# Altium PCB Trottinette_Connexion_PCB ASCII REV 1.00.PcbDoc
Units mil, origin at the board's own origin, x right, y up, seen from the top; angles counter-clockwise.
Board outline 2559.06 x 4133.86 mil, 2 copper layers (Top, Bottom), stack 60.63 mil thick; 20 components, 19 nets, 72 pads, 11 vias.
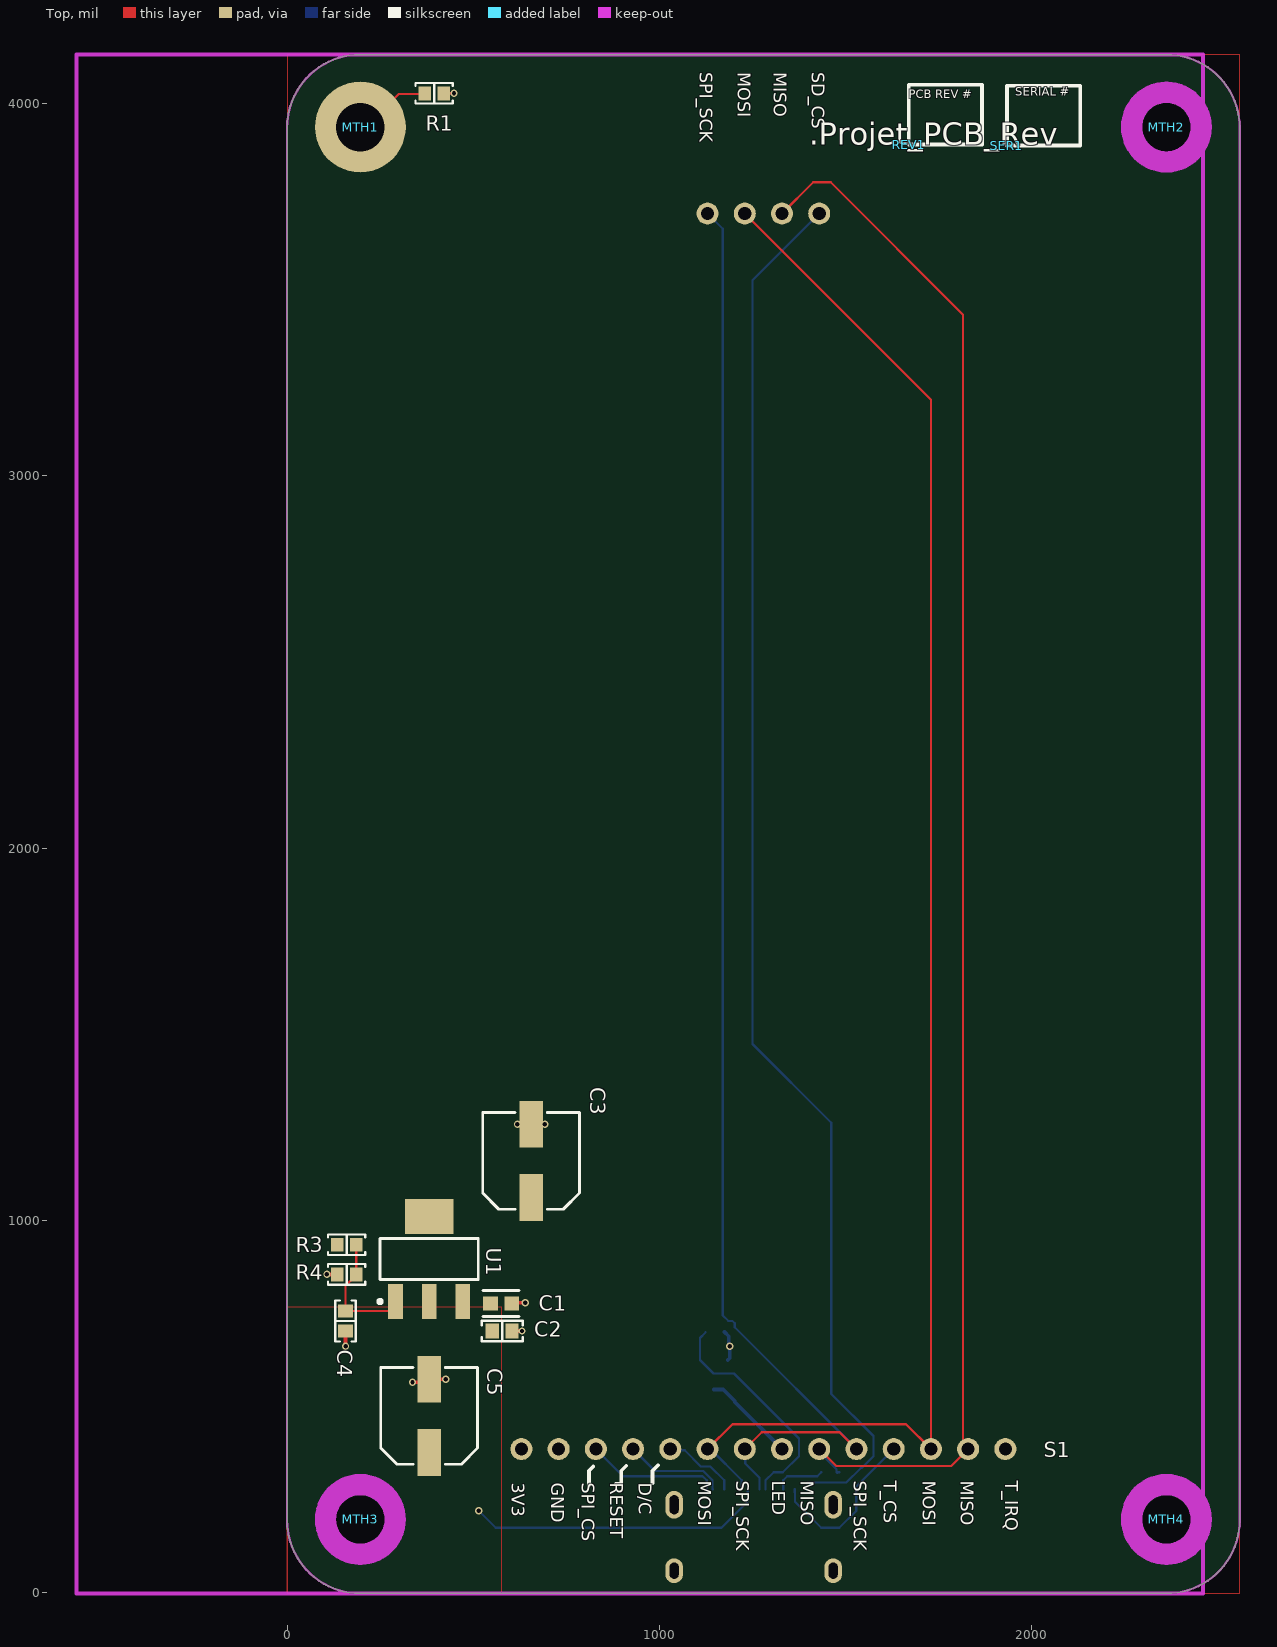
[diagram p0: Top view]
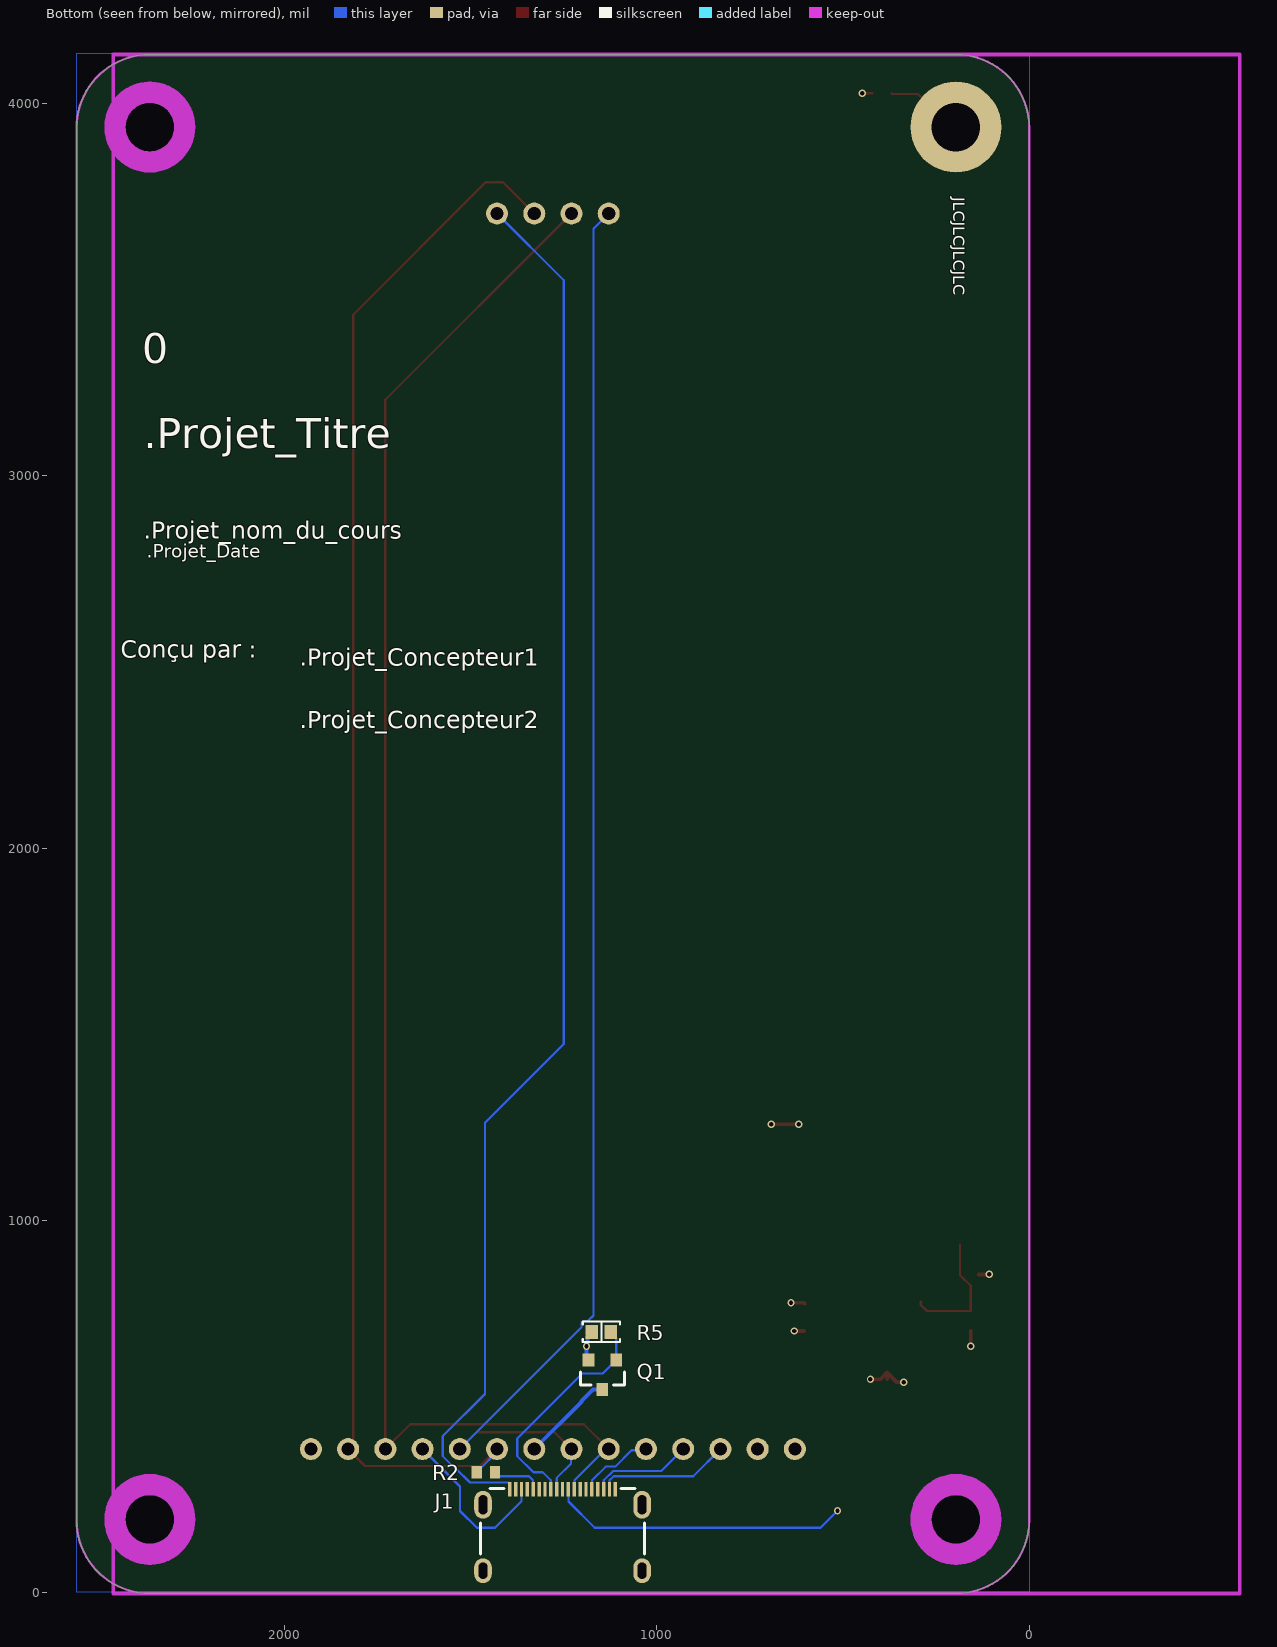
[diagram p1: Bottom view, seen from below]

## Layer stack, top to bottom
Top Solder: solder mask 0.4, Solder Resist, Dk 3.5
Top: signal copper 1.378
Dielectric 1: core 57.874, FR-4, Dk 4.6
Bottom: signal copper 1.378
Bottom Solder: solder mask 0.4, Solder Resist, Dk 3.5

## Board outline
0,194.84 0,3935 cw(c196.85,3935) 196.85,4131.85 2362.2,4131.85 cw(c2362.2,3935) 2559.06,3935 2559.06,194.84 cw(c2362.2,194.84) 2362.2,-2.01 196.85,-2.01 cw(c196.85,194.84)

## Design rules (kind name [scope] priority, off if disabled: settings)
AssemblyTestPointUsage [All] p0: scope1count=1 scope1_0_kind=Board scope1_0_value=Board scope2count=1 scope2_0_kind=Board scope2_0_value=Board commentlength=0
AssemblyTestpoint [All] p0: scope1count=1 scope1_0_kind=Board scope1_0_value=Board scope2count=1 scope2_0_kind=Board scope2_0_value=Board commentlength=0
BoardOutlineClearance [All] p0: scope1count=1 scope1_0_kind=Board scope1_0_value=Board scope2count=1 scope2_0_kind=Board scope2_0_value=Board commentlength=0 gap=7.87
BoardOutlineClearance [All] p1: gap=7.87 ignorepadtopadclearanceinfootprint=FALSE except(0: Arc-SplitContinuation Track-SplitContinuation SMDPad-SplitContinuation THPad-SplitContinuation Via-SplitContinuation Fill-SplitContinuation Poly-SplitContinuation Region-SplitContinuation Text-SplitContinuation)
Clearance [All] p0: scope1count=1 scope1_0_kind=Board scope1_0_value=Board scope2count=1 scope2_0_kind=Board scope2_0_value=Board commentlength=0 gap=6
Clearance [All] p1: gap=6 ignorepadtopadclearanceinfootprint=FALSE except(0: Arc-Hole Track-Hole SMDPad-Hole THPad-Hole Via-Hole Fill-Hole Poly-Hole Region-Hole Text-Hole; 5: Arc-Arc Arc-Track Track-Track SMDPad-Fill SMDPad-Poly SMDPad-Region; 5.98: Via-Fill Via-Poly Via-Region; 7.87: Arc-SMDPad Track-SMDPad; 10: Arc-Via Track-Via Via-Via; 12.99: Arc-THPad Track-THPad; 19.68: THPad-THPad)
ComponentClearance [All] p0: scope1count=1 scope1_0_kind=Board scope1_0_value=Board scope2count=1 scope2_0_kind=Board scope2_0_value=Board commentlength=0 gap=4 collisioncheckmode=3
ComponentClearance "Schematic Component Clearance Constraint" [All] p0: scope1count=1 scope1_0_kind=Component scope1_0_value=REV1 scope2count=1 scope2_0_kind=Board scope2_0_value=Board commentlength=0 gap=0 collisioncheckmode=3
ComponentClearance "Schematic Component Clearance Constraint_1" [All] p0: scope1count=1 scope1_0_kind=Component scope1_0_value=SER1 scope2count=1 scope2_0_kind=Board scope2_0_value=Board commentlength=0 gap=0 collisioncheckmode=3
ComponentClearance "Schematic Component Clearance Constraint_1" [InComponent('SER1')] p1: gap=0 collisioncheckmode=3 verticalgap=0 showdistances=FALSE
ComponentClearance "Schematic Component Clearance Constraint" [InComponent('REV1')] p2: gap=0 collisioncheckmode=3 verticalgap=0 showdistances=FALSE
ComponentClearance [All] p3: gap=4 collisioncheckmode=3 verticalgap=4 showdistances=FALSE
DiffPairsRouting [All] p0: scope1count=1 scope1_0_kind=Board scope1_0_value=Board scope2count=1 scope2_0_kind=Board scope2_0_value=Board commentlength=0
FabricationTestPointUsage [All] p0: scope1count=1 scope1_0_kind=Board scope1_0_value=Board scope2count=1 scope2_0_kind=Board scope2_0_value=Board commentlength=0 valid=0 allowmultiple=FALSE
FabricationTestpoint [All] p0: scope1count=1 scope1_0_kind=Board scope1_0_value=Board scope2count=1 scope2_0_kind=Board scope2_0_value=Board commentlength=0 side=3 testpointundercomponent=TRUE minsize=40 maxsize=100 preferedsize=60 minholesize=0 maxholesize=40 preferedholesize=32 testpointgrid=1
FanoutControl Fanout_Default [All] p0: scope1count=1 scope1_0_kind=Board scope1_0_value=Board scope2count=1 scope2_0_kind=Board scope2_0_value=Board commentlength=30 // Fanout_Default (Default Rule)
FanoutControl Fanout_Small [All] p0 off: scope1count=1 scope1_0_kind=Board scope1_0_value=Board scope2count=1 scope2_0_kind=Board scope2_0_value=Board commentlength=84 // Protel DXP Scope 1 Expression Was: (CompPinCount < 5)   Fanout_Small (Default Rule)
FanoutControl Fanout_SOIC [All] p0 off: scope1count=1 scope1_0_kind=Board scope1_0_value=Board scope2count=1 scope2_0_kind=Board scope2_0_value=Board commentlength=71 // Protel DXP Scope 1 Expression Was: IsSOIC   Fanout_SOIC (Default Rule)
FanoutControl Fanout_LCC [All] p0 off: scope1count=1 scope1_0_kind=Board scope1_0_value=Board scope2count=1 scope2_0_kind=Board scope2_0_value=Board commentlength=69 // Protel DXP Scope 1 Expression Was: IsLCC   Fanout_LCC (Default Rule)
FanoutControl Fanout_BGA [All] p0 off: scope1count=1 scope1_0_kind=Board scope1_0_value=Board scope2count=1 scope2_0_kind=Board scope2_0_value=Board commentlength=69 // Protel DXP Scope 1 Expression Was: IsBGA   Fanout_BGA (Default Rule)
Height [All] p0: scope1count=1 scope1_0_kind=Board scope1_0_value=Board scope2count=1 scope2_0_kind=Board scope2_0_value=Board commentlength=0
HoleSize [All] p0: scope1count=1 scope1_0_kind=Board scope1_0_value=Board scope2count=1 scope2_0_kind=Board scope2_0_value=Board commentlength=0 absolutevalues=TRUE maxlimit=248.03 minlimit=11.81 maxpercent=80.000 minpercent=20.000
HoleSize [All] p1: absolutevalues=TRUE maxlimit=248.03 minlimit=11.81 maxpercent=80.000 minpercent=20.000
HoleToHoleClearance [All] p0: scope1count=1 scope1_0_kind=Board scope1_0_value=Board scope2count=1 scope2_0_kind=Board scope2_0_value=Board commentlength=0
HoleToHoleClearance [All] p1: gap=19.68 allowstackedmicrovias=FALSE
LayerPairs [All] p0: scope1count=1 scope1_0_kind=Board scope1_0_value=Board scope2count=1 scope2_0_kind=Board scope2_0_value=Board commentlength=0 enforce=TRUE
MinimumAnnularRing [All] p0: scope1count=1 scope1_0_kind=Board scope1_0_value=Board scope2count=1 scope2_0_kind=Board scope2_0_value=Board commentlength=0 minimumring=5.12
MinimumAnnularRing [All] p1: minimumring=5.12
MinimumSolderMaskSliver [All] p0: scope1count=1 scope1_0_kind=Board scope1_0_value=Board scope2count=1 scope2_0_kind=Board scope2_0_value=Board commentlength=0
MinimumSolderMaskSliver [All] p1: minsoldermaskwidth=3.94
NetAntennae [All] p0: scope1count=1 scope1_0_kind=Board scope1_0_value=Board scope2count=1 scope2_0_kind=Board scope2_0_value=Board commentlength=0
PasteMaskExpansion [All] p0: scope1count=1 scope1_0_kind=Board scope1_0_value=Board scope2count=1 scope2_0_kind=Board scope2_0_value=Board commentlength=0 expansion=0
PlaneClearance [All] p0: scope1count=1 scope1_0_kind=Board scope1_0_value=Board scope2count=1 scope2_0_kind=Board scope2_0_value=Board commentlength=0 clearance=6
PlaneClearance [All] p1: clearance=6
PlaneConnect [All] p0: scope1count=1 scope1_0_kind=Board scope1_0_value=Board scope2count=1 scope2_0_kind=Board scope2_0_value=Board commentlength=0 planeconnectstyle=Relief reliefexpansion=20 reliefentries=4 reliefconductorwidth=10 reliefairgap=10
PlaneConnect [All] p1: pad.planeconnectstyle=Relief pad.reliefexpansion=20 pad.reliefentries=4 pad.reliefconductorwidth=10 pad.reliefairgap=10 via.planeconnectstyle=Direct via.reliefexpansion=20 via.reliefentries=4 via.reliefconductorwidth=10 via.reliefairgap=10
PolygonConnect [All] p0: scope1count=1 scope1_0_kind=Board scope1_0_value=Board scope2count=1 scope2_0_kind=Board scope2_0_value=Board commentlength=0 connectstyle=Relief reliefconductorwidth=10 reliefentries=4 polygonreliefangle="90 Angle"
PolygonConnect [All] p1: thpad.connectstyle=Relief thpad.reliefconductorwidth=10 thpad.reliefentries=4 thpad.polygonreliefangle="90 Angle" thpad.airgapwidth=10 smdpad.connectstyle=Direct smdpad.reliefconductorwidth=10 smdpad.reliefentries=4 smdpad.polygonreliefangle="90 Angle" smdpad.airgapwidth=10 via.connectstyle=Direct via.reliefconductorwidth=10 via.reliefentries=4 via.polygonreliefangle="90 Angle" via.airgapwidth=10
RoutingCorners [All] p0: scope1count=1 scope1_0_kind=Board scope1_0_value=Board scope2count=1 scope2_0_kind=Board scope2_0_value=Board commentlength=0 cornerstyle=45-Degree minsetback=100 maxsetback=100
RoutingLayers [All] p0: scope1count=1 scope1_0_kind=Board scope1_0_value=Board scope2count=1 scope2_0_kind=Board scope2_0_value=Board commentlength=0 top layer=Automatic bottom layer=Automatic
RoutingPriority [All] p0: scope1count=1 scope1_0_kind=Board scope1_0_value=Board scope2count=1 scope2_0_kind=Board scope2_0_value=Board commentlength=0
RoutingTopology [All] p0: scope1count=1 scope1_0_kind=Board scope1_0_value=Board scope2count=1 scope2_0_kind=Board scope2_0_value=Board commentlength=0 topology=Shortest
RoutingVias [All] p0: scope1count=1 scope1_0_kind=Board scope1_0_value=Board scope2count=1 scope2_0_kind=Board scope2_0_value=Board commentlength=0 holewidth=11.81 width=19.68 viastyle="Through Hole" minholewidth=11.81 minwidth=19.68 maxholewidth=248.03 maxwidth=255.91
RoutingVias [All] p1: holewidth=11.81 width=19.68 viastyle="Through Hole" minholewidth=11.81 minwidth=19.68 maxholewidth=248.03 maxwidth=255.91
ShortCircuit [All] p0: scope1count=1 scope1_0_kind=Board scope1_0_value=Board scope2count=1 scope2_0_kind=Board scope2_0_value=Board commentlength=0 allowed=FALSE
SilkToBoardRegionClearance [All] p0: scope1count=1 scope1_0_kind=Board scope1_0_value=Board scope2count=1 scope2_0_kind=Board scope2_0_value=Board commentlength=0
SilkToSilkClearance [All] p0: scope1count=1 scope1_0_kind=Board scope1_0_value=Board scope2count=1 scope2_0_kind=Board scope2_0_value=Board commentlength=0
SilkToSilkClearance [All] p1: silktosilkclearance=4
SilkToSolderMaskClearance [All] p0 off: scope1count=1 scope1_0_kind=Board scope1_0_value=Board scope2count=1 scope2_0_kind=Board scope2_0_value=Board commentlength=44 // Protel DXP Scope 1 Expression Was: IsPad
SilkToSolderMaskClearance [IsPad] p1: minsilkscreentomaskgap=0.94 clearancetoexposedcopper=FALSE
SolderMaskExpansion [All] p0: scope1count=1 scope1_0_kind=Board scope1_0_value=Board scope2count=1 scope2_0_kind=Board scope2_0_value=Board commentlength=0 expansion=2
SolderMaskExpansion SolderMaskExpansion_Via [All] p0 off: scope1count=1 scope1_0_kind=Board scope1_0_value=Board scope2count=1 scope2_0_kind=Board scope2_0_value=Board commentlength=44 expansion=4 // Protel DXP Scope 1 Expression Was: isVia
SolderMaskExpansion SolderMaskExpansion_Via [isVia] p1: expansion=4 istentingtop=TRUE
SolderMaskExpansion [All] p2: expansion=2 istentingtop=FALSE
UnRoutedNet [All] p0: scope1count=1 scope1_0_kind=Board scope1_0_value=Board scope2count=1 scope2_0_kind=Board scope2_0_value=Board commentlength=0
UnpouredPolygon [All] p0: scope1count=1 scope1_0_kind=Board scope1_0_value=Board scope2count=1 scope2_0_kind=Board scope2_0_value=Board commentlength=0
Width [All] p0: scope1count=1 scope1_0_kind=Board scope1_0_value=Board scope2count=1 scope2_0_kind=Board scope2_0_value=Board commentlength=0 maxlimit=1000 minlimit=5 preferedwidth=6
Width [All] p1: maxlimit=1000 minlimit=5 preferedwidth=6 minimp=50.000000 maximp=50.000000 favimp=50.000000
22 further rules are at their usual default settings.

## Classes and differential pairs
component class Trottinette_Connexion_PCB: C2 C4 C5 J1 MTH1 MTH2 MTH3 MTH4 Q1 R1 R2 R3 R4 R5 U1
component class Trottinette_Connexion_Title: REV1 SER1

## Components (designator, comment, footprint, x,y, rotation, side; value= is the part's Value field where it differs from the comment)
C1 "0603ZC104MAT2A" FP-0603-L_1_6_0_15-W_0_81-IPC_B 575,776.84 r0 top
C2 "10 µF" "CAP 0603_1608" 577.9,702.91 r180 top
C3 "100 µF" "CAP ALSMD 6.6MM H6.1MM" 655.57,1160 r90 top
C4 "10 µF" "CAP 0603_1608" 157.16,729.88 r90 top
C5 "100 µF" "CAP ALSMD 6.6MM H6.1MM" 381.7,475 r90 top
J1 "685119136923" 685119136923 1253.56,130 r180 bottom
MTH1 "MTH_M3" MTH_M3 157.48,3925 r0 top
MTH2 "MTH_M3_NON_PLATED" MTH_M3_NON_PLATED 2362.2,3937.01 r0 top
MTH3 "MTH_M3_NON_PLATED" MTH_M3_NON_PLATED 196.85,196.85 r0 top
MTH4 "MTH_M3_NON_PLATED" MTH_M3_NON_PLATED 2362.2,196.85 r0 top
Q1 "DMP6350S-7" FP-SOT23-MFG 1146.64,585.52 r270 bottom
R1 "0 Ohms" "RES 0603_1608" 395.36,4027.57 r0 top
R2 "ERJ3EKF30R0V" RESC1608X55X30LL15T15 1459.41,323.7 r0 bottom
R3 "180 Ohms" "RES 0603_1608" 160.31,934.64 r180 top
R4 "300 Ohms" "RES 0603_1608" 160.31,855.08 r180 top
R5 "10 kOhms" "RES 0603_1608" 1149.3,700.64 r0 bottom
REV1 "Revision Cartridge Mini" REV_REVISION_CARTRIDGE_MINI 1670,3890 r0 top
S1 "ILI9341" PCBComponent_1 1279.51,2064.93 r90 top
SER1 "Serial Cartridge MICRO" SER_SERIAL_CARTRIDGE_MICRO 1933.78,3887.48 r0 top
U1 "LM1117MPX-ADJ" MP04A_N 381.7,896.3 r90 top

## Footprints (in the part's own frame and the unit in brackets; to place one, negate y for a bottom-side part, rotate by r counter-clockwise, add the part's x,y. Pads: shape width x height; smd on the part's side, far side on the other; paste and mask are expansions set on the pad)
685119136923 [mm] "Mini HDMI SMT Horizontal"
  rect 0.23x1 smd: 1(3.6,3.75) 2(3.2,3.75) 3(2.8,3.75) 4(2.4,3.75) 5(2,3.75) 6(1.6,3.75) 7(1.2,3.75) 8(0.8,3.75) 9(0.4,3.75) 10(0,3.75) 11(-0.4,3.75) 12(-0.8,3.75) 13(-1.2,3.75) 14(-1.6,3.75) 15(-2,3.75) 16(-2.4,3.75) 17(-2.8,3.75) 18(-3.2,3.75) 19(-3.6,3.75)
  oval 1.2x1.7 hole 0.6 slot 1.1 at 90 deg: Shell(-5.425,-1.8) Shell(5.425,-1.8)
  oval 1.2x1.9 hole 0.6 slot 1.3 at 90 deg: Shell(-5.425,2.7) Shell(5.425,2.7)
  silkscreen extent -5.6,-0.65 5.6,3.8
"CAP 0603_1608" [mm] "Chip Capacitor, 2-Leads, Body 1.60x0.80mm, IPC Medium Density"
  rect 0.9x1 smd: 1(-0.675,0) 2(0.675,0)
  silkscreen extent -1.4,-0.7 1.4,0.7
"CAP ALSMD 6.6MM H6.1MM" [mm] "Aluminum Electrolytic Capacitor, Body 6.60x6.60x6.10mm, IPC Low Density"
  rect 3.2x1.6 smd: 1(-2.5,0) 2(2.5,0)
  silkscreen extent -3.3,-3.3 3.3,3.3
FP-0603-L_1_6_0_15-W_0_81-IPC_B [mil]
  rect 39.63x38.12 smd paste+0 mask+0: 1(-28.58,0) 2(28.58,0)
  silkscreen extent -48,-35 48,35
FP-SOT23-MFG [mm]
  rect 0.9x0.8 smd paste+0 mask+0: 1(-1,0.95) 2(-1,-0.95) 3(1,0)
  silkscreen extent -0.18,-1.5 0.7,1.5
MP04A_N [mm] "SOT223, 4-Leads, Body 6.5x3.5mm, Pitch 2.3mm, Lead Span 7mm, IPC Medium Density"
  rect 2.4x1 smd: 1(-2.9,2.3) 2(-2.9,0) 3(-2.9,-2.3)
  rect 2.4x3.3 smd: 4(2.9,0)
  silkscreen extent -3.02,-3.35 1.4,3.47
MTH_M3 [mm] "Mounting Hole Metric M3"
  round 6.2 hole 3.3 paste-7.62 mask+0: 1(1,0.305)
MTH_M3_NON_PLATED [mm] "Mounting Hole Metric M3 NON_PLATED"
  round 0 hole 3.3 unplated paste-7.62 mask+0: 1(0,0)
  Top keep-out circle w1.45: c0,0 r2.375
  Bottom keep-out circle w1.45: c0,0 r2.375
PCBComponent_1 [mm]
  round 1.5 hole 0.9: 1(-42.65,16.51) 2(-42.65,13.97) 3(-42.65,11.43) 4(-42.65,8.89) 5(-42.65,6.35) 6(-42.65,3.81) 7(-42.65,1.27) 8(-42.65,-1.27) 9(-42.65,-3.81) 10(-42.65,-6.35) 11(-42.65,-8.89) 12(-42.65,-11.43) 13(-42.65,-13.97) 14(-42.65,-16.51) 15(41.65,-3.81) 16(41.65,-1.27) 17(41.65,1.27) 18(41.65,3.81)
  Keep-Out Layer lines w0.254: -52.5,46.863 -52.5,-30 52.5,-30 52.5,46.863 -52.5,46.863
"RES 0603_1608" [mm] "Chip Resistor, 2-Leads, Body 1.60x0.80mm, IPC Medium Density"
  rect 0.85x0.95 smd: 1(-0.65,0) 2(0.65,0)
  silkscreen extent -1.27,-0.7 1.27,0.7
RESC1608X55X30LL15T15 [mm] "Chip Resistor, 2-Leads, Body 1.60x0.80mm, IPC High Density"
  rect 0.7x0.85 smd: 1(-0.625,0) 2(0.625,0)
REV_REVISION_CARTRIDGE_MINI [mil]
  silkscreen extent 0,0 197,160
SER_SERIAL_CARTRIDGE_MICRO [mil]
  silkscreen extent 0,0 197,160

## Part data
C1: library part CMP-2006-04550-2, "General Purpose Ceramic Capacitor, 0603, 100nF, 20%, X7R, 15%, 10V"
C2 C4: library part GRT188R61A106KE13D, "CAP CER 10UF 10V X5R 0603"
C3 C5: library part 10SGV100M6.3X6.1, "CAP ALUM 100UF 20% 10V SMD"
J1: library part CMP-1502-00171-2
MTH1: library part CMP-006-000008-2, "MTH - MOUNTING HOLE M3 PLATED - M3"
MTH2 MTH3 MTH4: library part CMP-006-000010-2, "MTH - MOUNTING HOLE M3 NON-PLATED - M3"
Q1: library part CMP-12801-000018-2, "MOSFET P-CHA 60V 720MW SOT23"
R1: library part CR0603AJ/-000EAS, "RESA-AS 0603 0R JUMPER 100MW"
R2: library part CMP-2000-00423-1, "30Ohms"
R3: library part RNCP0603FTD180R, "RES 180 OHM 1% 1/8W 0603"
R4: library part CRCW0603300RFKEA, "RES SMD 300 OHM 1% 1/10W 0603"
R5: library part RNCS0603BKE10K0, "RES 10K OHM 0.1% 1/16W 0603"
REV1: library part REV_REVISION_CARTRIDGE_MINI, "REV - REVISION CARTRIDGE MINI"
S1: "3.2\" 240x320 TFT LCD ILI9341"
SER1: library part SER_SERIAL_CARTRIDGE_MICRO, "SER - SERIAL CARTRIDGE MICRO"
U1: library part CMP-0062-01642-3, "800mA Low-Dropout Linear Regulator, 4-pin SOT-223"

## Via types
v1: diameter 19.68, hole 11.81, Top to Bottom, tented both sides, 11 vias

## Nets (pads, with @x,y where several pads share a name; then routed paths per layer and width w, separated by ;. In a path a pad name is that pad's centre, name@x,y a point inside that pad or via, vN(x,y) a via of type N, cw(c..) or ccw(c..) an arc to the next point about the centre after c; other vN are vias at no path point)
3V3: C3.1 Q1.2 R3.2 R5.2 S1.1 U1.2 U1.4 | length 83.7
  Bottom w10: R5.2 1186.62,688.91 1186.62,667.26 1189.09,664.8 v1(1189.09,662.18) 1189.09,629.94 Q1.2
5V0: C1.1 C2.2 C5.1 J1.9 U1.3 | length 803.6
  Bottom w6: v1(515,220) 560.74,174.26 1166.92,174.26 1237.46,244.8 1237.46,277.29 J1.9
DC_PIN: J1.5 S1.5 | length 204.1
  Bottom w6: S1.5 1032.41,382.91 1068.04,382.91 1112.2,338.74 1137.56,338.74 1174.47,301.83 1174.47,277.98 J1.5
GND: C1.2 C2.1 C3.2 C4.1 C5.2 J1.16 R1.2 R4.2 S1.2 | length 360.1
  Top w6: R1.2@420.95,4027.57 v1(448.51,4027.57)
  Top w10: v1(107.16,855.08) R4.2 ; v1(157.16,662) C4.1 ; v1(336.9,565) 355.2,565 C5.2@381.7,591.5 ; C5.2 C5.2@381.7,591.5 ; v1(426.55,573.43) 399.77,573.43 C5.2@381.7,591.5 ; C1.2 605.78,779.04 v1(639.74,779.04) ; C2.1 v1(631.05,702.92) ; v1(618.83,1258.43) C3.2 v1(692.68,1258.43)
GPIO1: J1.6
GPIO38: J1.18
GPIO39: J1.14
LED_ALIM: Q1.3 S1.8 | length 250.7
  Bottom w10: Q1.3 1171.56,546.15 1202.73,514.98 1202.73,512.59 S1.8
LED_CONTROL: J1.12 Q1.1 R5.1 | length 623.1
  Bottom w6: R5.1 1123.71,698.67 1109.23,684.2 Q1.1 1145.51,588.61 1200.73,588.61 1375.03,414.31 1375.03,366.95 1331.56,323.48 1307.06,323.48 1285.4,301.83 1285.4,294.32 1285.05,293.98 J1.12
NetC4_2: C4.2 R3.1 R4.1 U1.1 | length 340
  Top w6: R3.1 R4.1 185.9,853.11 157.16,824.37 C4.2 274.46,756.46 291.15,773.14 U1.1
NetJ1_15: J1.15 R2.1 | length 135.6
  Bottom w6: J1.15 1332.64,277.98 1332.64,301.83 1343.74,312.93 1424.02,312.93 R2.1
NetMTH1_1: MTH1.1 R1.1 | length 210.4
  Top w6: MTH1.1 242.41,3982.57 256.66,3982.57 299.7,4025.6 367.8,4025.6 R1.1
RST_PIN: J1.3 S1.4 | length 272.6
  Bottom w6: S1.4 988.22,327.1 1117.7,327.1 1142.97,301.83 1142.97,277.98 J1.3
SD_CS: J1.19 S1.15 | length 3772.5
  Bottom w6: J1.19 1395.29,292.8 1398.84,296.35 1416.27,296.35 1416.52,296.1 1456.36,296.1 1463.57,296.4 cw(c1463.82,290.41) 1465.73,296.1 1502.3,296.1 1540.91,334.71 1542.79,334.71 1575.03,366.95 1575.03,420.69 1461.91,533.81 1461.91,1262.32 1250.14,1474.1 1250.14,3525.32 S1.15
SPI_CS: J1.2 S1.3 | length 356.8
  Bottom w6: S1.3 902.39,312.93 1116.13,312.93 1127.23,301.83 1127.23,277.98 J1.2
SPI_MISO: R2.2 S1.9 S1.13 S1.16 | length 4260.7
  Top w6: S1.16 1413.3,3788.48 1460.21,3788.48 1815.8,3432.89 1815.8,413.88 1819.36,410.32 1819.36,403.08 1815.8,399.52 S1.13 1783.99,340.29 1475.03,340.29 S1.9
  Bottom w6: R2.2 1479.85,323.7 1477.77,321.63 1475.69,323.7 1475.69,331.93 S1.9@1429.51,378.11 ; S1.9@1429.51,378.11 S1.9 S1.9@1429.51,378.11
SPI_MOSI: J1.8 S1.6 S1.12 S1.17 | length 4332.7
  Top w6: S1.6 1196.41,452.7 1662.62,452.7 S1.12 1729.51,3204.69 S1.17
  Bottom w6: S1.6 1137.73,385.81 1221.71,301.83 1221.71,277.98 J1.8
SPI_SCK: J1.11 S1.7 S1.10 S1.18 | length 3953.4
  Top w6: S1.7 1275.03,431.33 1483.99,431.33 S1.10
  Bottom w6: S1.18 1170.58,3663.62 1170.58,744.74 1185.1,730.22 1196.13,730.22 1202.5,723.85 1202.5,712.82 S1.10 ; S1.7 1230.52,384.8 1230.52,347.28 1269.3,308.49 J1.11
T_CS: J1.17 S1.11 | length 453.6
  Bottom w6: J1.17 1363.79,268.99 1364.14,268.64 1364.14,244.8 1434.68,174.26 1483.55,174.26 1529.02,219.73 1529.02,285.32 S1.11
pads on no net: J1.1 J1.4 J1.7 J1.10 J1.13 J1.Shell MTH2.1 MTH3.1 MTH4.1 S1.14

## Polygon pours and split planes (outlines as drawn)
5V0 on Top "5V0_L01_P002" (solid, remove dead copper, pour order 2): 0,768.75 575,768.75 575,-2.01 0,-2.01
3V3 on Top "3V3_L01_P004" (solid, remove dead copper, pour order 4): 0,4131.55 0,-2.01 2559.06,-2.01 2559.06,4131.55
GND on Bottom "GND_L02_P007" (solid, remove dead copper, pour order 7): 0,4135.03 0,1.48 2559.06,1.48 2559.06,4135.03

## Keep-outs
Keep-Out Layer:
  the board outline again, w5.91

## Silkscreen, mask and mechanical layers (free items; w line width, h text height)
Top Overlay:
  lines w10: 811.23,287.06 811.23,327.52 822.77,339.06 ; 882.96,292.48 897.85,292.48 897.85,327.52 911.24,340.91 ; 981.71,294.13 981.71,327.52 996.61,342.42
  text "SPI_SCK" at 1097.01,4084.59 h59.06 r270
  text "MOSI" at 1198.63,4084.59 h59.06 r270
  text "MISO" at 1295.39,4084.59 h59.06 r270
  text "SD_CS" at 1397.01,4084.59 h59.06 r270
  text "SPI_SCK" at 1510.36,301.33 h59.06 r270
  text "T_CS" at 1590.8,301.33 h59.06 r270
  text "MOSI" at 1696.08,301.33 h59.06 r270
  text "MISO" at 1797.43,301.33 h59.06 r270
  text "T_IRQ" at 1917.01,301.33 h59.06 r270
  text "MOSI" at 1092.97,300.79 h59.06 r270
  text "SPI_SCK" at 1194.63,300.79 h59.06 r270
  text "LED" at 1290.78,300.79 h59.06 r270
  text "MISO" at 1367.5,300.79 h59.06 r270
  text "3V3" at 591.13,295.54 h59.06 r270
  text "GND" at 697.4,295.54 h59.06 r270
  text "SPI_CS" at 779.98,295.54 h59.06 r270
  text "RESET" at 856,295.54 h59.06 r270
  text "D/C" at 933.22,295.54 h59.06 r270
Bottom Overlay:
  text "JLCJLCJLCJLC" at 203.63,3747.99 h31.5 r90
  text "0" at 2382.88,3275.1 h137.8
  text ".Projet_Titre" at 2378.95,3047.88 h137.8
  text ".Projet_nom_du_cours" at 2378.95,2815 h78.74
  text ".Projet_Date" at 2370,2780 h36
  text "Conçu par :" at 2440,2495 h78.74
  text ".Projet_Concepteur1" at 1960,2473.23 h78.74
  text ".Projet_Concepteur2" at 1960,2306.56 h78.74
Board Outline:
  the board outline again, w10

## Text inside footprints (layer, text, board x,y; h text height)
J1: Top Assembly "PCB Edge" at 1325.66,-15.89 h24
REV1: Top Overlay "PCB REV #" at 1670,4006.14 h39.37
SER1: Top Overlay "SERIAL #" at 1955.95,4013.15 h39.37